# EAGLE board LumiBeePCB_v1A_2130spi_1 (EAGLE 9.4.1)
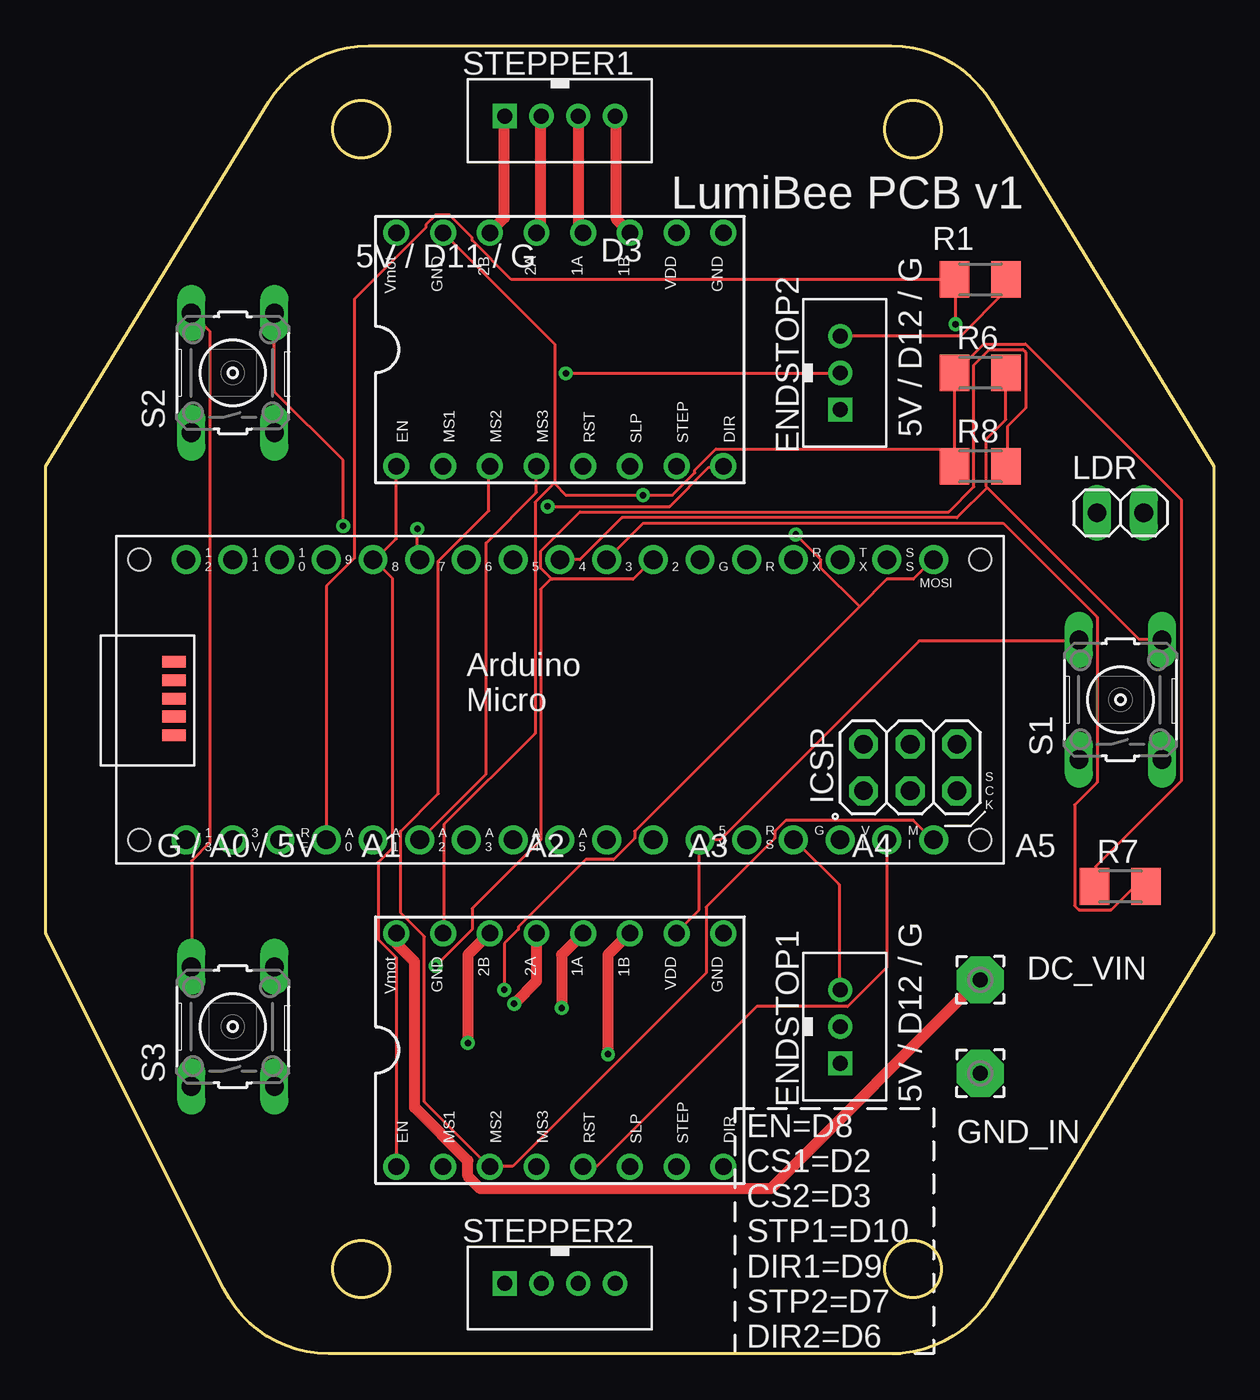
[diagram p0: board, top side]
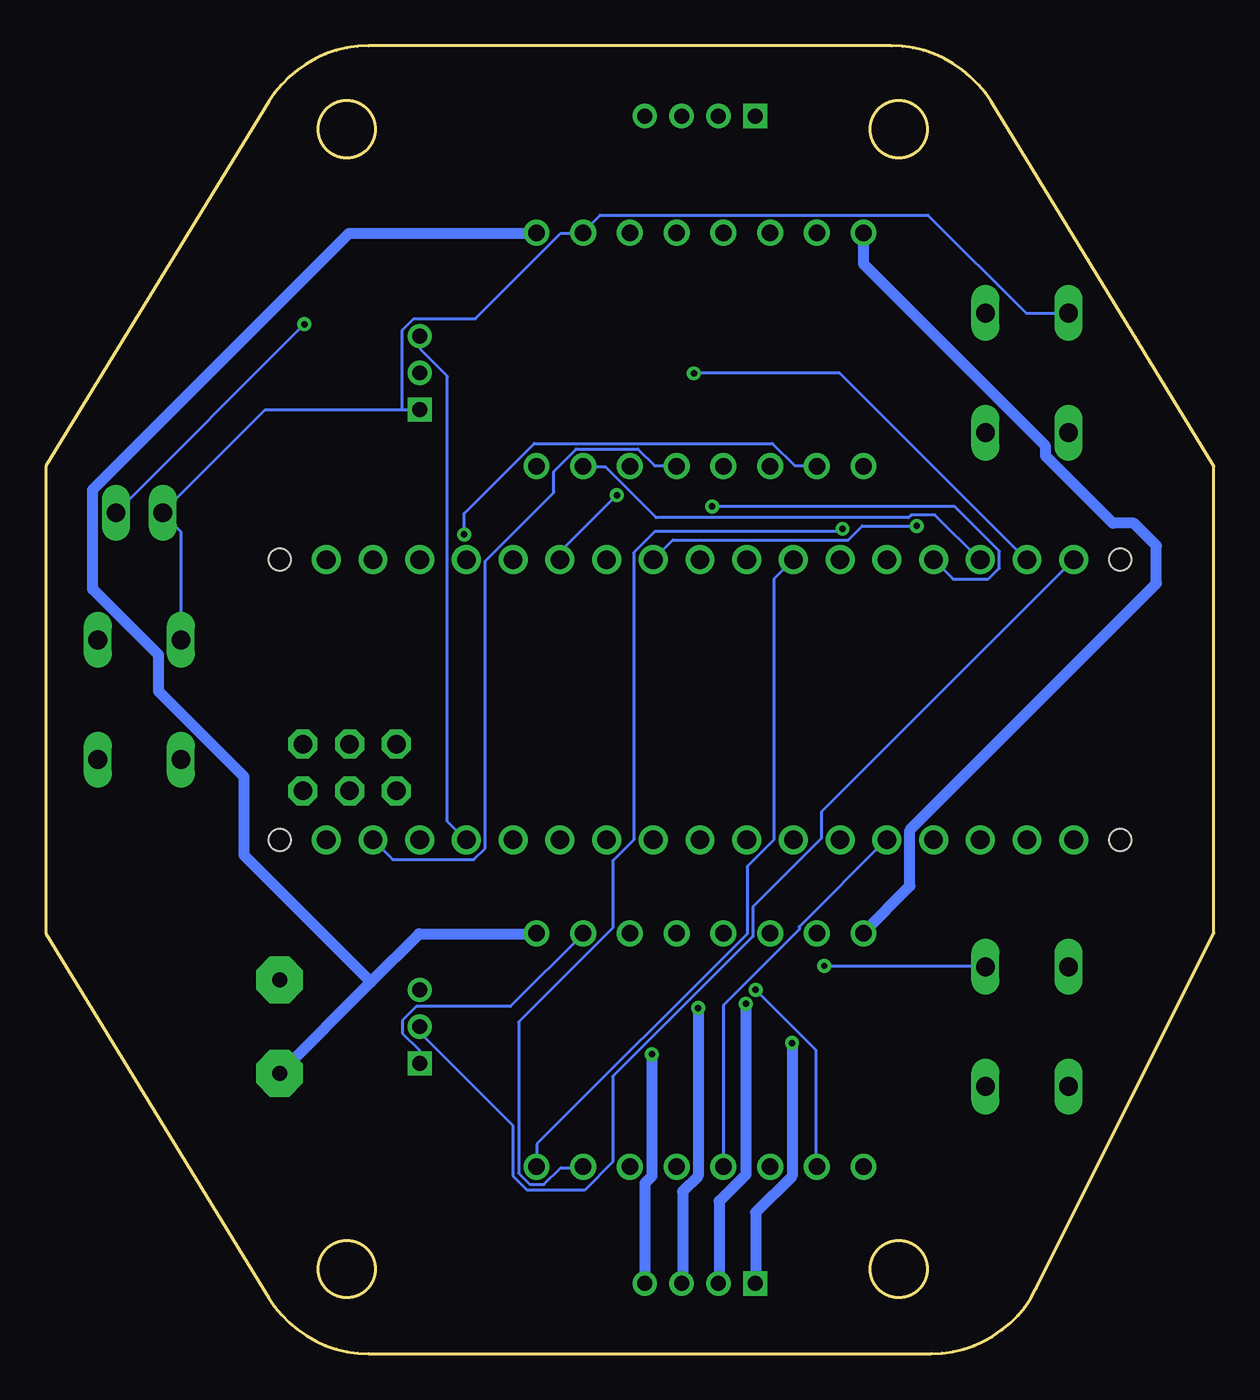
[diagram p1: board, bottom side, seen from below]

Size 63.5 x 71.12 mm. Coordinates in mm from the lower left corner, seen from the top.
Outline: 0,22.86 0,48.26 12.11,68.08 arc-59 17.53,71.12 45.97,71.12 arc-59 51.39,68.08 63.5,48.26 63.5,22.86 51.39,3.04 arc-59 45.97,0 15.36,0 arc-63 9.67,3.51 0,22.86
Outline: circle at 47.14,66.6 radius 1.55
Outline: circle at 17.14,66.6 radius 1.55
Outline: circle at 47.14,4.6 radius 1.55
Outline: circle at 17.14,4.6 radius 1.55
Copper layers (1*16): Top 0.035mm / dielectric 1.5mm / Bottom 0.035mm
Design rules "default": minimum track width 6mil, minimum drill 0.35mm, track to track 6mil, track to pad 6mil, pad to pad 6mil, via to via 6mil, smd to smd 6mil, copper to edge 40mil, drill to drill 6mil, minimum pad ring 10mil, minimum via ring 8mil, stop-mask expansion 4mil, vias tented up to drill 0mil, thermal gap 10mil
Net classes: 1 power: width 0.61 mm

## Footprints (pad centres in the part's own frame; a part is rotated, then mirrored left to right if it is on the bottom)
2,54/0,8 = drill 0.813 pad 2.54 octagon: 1 0,0
B3B-PH-K-S = drill 0.813 square: 1 2,0 | drill 0.813: 2 0,0; 3 -2,0
1X02 = drill 1.016 long: 1 -1.27,0; 2 1.27,0
ARDUINO_MICRO = drill 1.016 pad 1.575: 3V3 6.35,1.27; +5V 31.75,1.27; A0 11.43,1.27; A1 13.97,1.27; A2 16.51,1.27; A3 19.05,1.27; A4 21.59,1.27; A5 24.13,1.27; D2 29.21,16.51; D3 26.67,16.51; D4 24.13,16.51; D5 21.59,16.51; D6 19.05,16.51; D7 16.51,16.51; D8 13.97,16.51; D9 11.43,16.51; D10 8.89,16.51; D11 6.35,16.51; D12 3.81,16.51; D13 3.81,1.27; GND 31.75,16.51; GND. 36.83,1.27; MISO] 41.91,1.27; MOSI 44.45,16.51; NC 26.67,1.27; NC. 29.21,1.27; REF 8.89,1.27; RST 34.29,16.51; RST. 34.29,1.27; RX1 36.83,16.51; SCK 44.45,1.27; SS 41.91,16.51; TX1 39.37,16.51; VIN 39.37,1.27 | drill 1.016 pad 1.575 octagon: 5V 40.64,6.477; GND_ 45.72,6.477; MISO. 40.64,3.937; MOSI. 43.18,6.477; RESET.. 45.72,3.937; SCK. 43.18,3.937 | smd 1.27 x 0.635: <USB>+V 3.15,10.947; <USB>D+ 3.15,9.957; <USB>D- 3.15,8.941; <USB>GND 3.15,6.96; <USB>ID 3.15,7.976 | hole 1.2: 1.27,1.27; 1.27,16.51; 46.99,16.51; 46.99,1.27
M1206 = smd 1.6 x 2: 1 -1.4,0; 2 1.4,0
B3F-10XX = drill 1.016 long: 1 -3.251,2.261; 2 3.251,2.261; 3 -3.251,-2.261; 4 3.251,-2.261
B4B-PH-K-S = drill 0.813 square: 1 3,0 | drill 0.813: 2 1,0; 3 -1,0; 4 -3,0
A4988BREAKOUT = drill 0.9: 1A 8.89,1.27; 1B 11.43,1.27; 2A 6.35,1.27; 2B 3.81,1.27; DIR 16.51,-11.43; EN -1.27,-11.43; GND 16.51,1.27; GND@0 1.27,1.27; MS1 1.27,-11.43; MS2 3.81,-11.43; MS3 6.35,-11.43; RST 8.89,-11.43; SLP 11.43,-11.43; STEP 13.97,-11.43; VDD 13.97,1.27; VMOT -1.27,1.27

## Placement (x,y rotation side)
DC_VIN  [2,54/0,8]  50.8,20.32 0 top
ENDSTOP1  3PIN  [B3B-PH-K-S]  43.18,17.78 270 top
ENDSTOP2  3PIN  [B3B-PH-K-S]  43.18,53.34 270 top
GND_IN  [2,54/0,8]  50.8,15.24 0 top
LDR  [1X02]  58.42,45.72 0 top
PCB1  ARDUINO_MICRO  [ARDUINO_MICRO]  3.81,26.67 0 top
R1  [M1206]  50.8,58.42 180 top
R6  [M1206]  50.8,53.34 0 top
R7  [M1206]  58.42,25.4 0 top
R8  [M1206]  50.8,48.26 0 top
S1  [B3F-10XX]  58.42,35.56 90 top
S2  [B3F-10XX]  10.16,53.34 90 top
S3  [B3F-10XX]  10.16,17.78 90 top
STEPPER1  4PIN  [B4B-PH-K-S]  27.94,67.31 180 top
STEPPER2  4PIN  [B4B-PH-K-S]  27.94,3.81 180 top
U$1  A4988BREAKOUT  [A4988BREAKOUT]  20.32,59.69 0 top
U$2  A4988BREAKOUT  [A4988BREAKOUT]  20.32,21.59 0 top

## Library data of the parts
DC_VIN GND_IN = wirepad
ENDSTOP1 ENDSTOP2 STEPPER1 STEPPER2 = jst_eph
LDR = pinhead
PCB1 = E14_Arduino_revC
R1 R6-R8 = rcl; SPICEPREFIX: R
S1-S3 = switch-omron; MPN: B3F-1000; OC_FARNELL: 176432; OC_NEWARK: 36M3542
U$1 U$2 = RepRapjr

## Nets
CS1: PCB1.A1 U$2.MS3
CS2: PCB1.A2 U$1.MS3
GND: ENDSTOP1.3 ENDSTOP2.3 PCB1.GND. R1.1
MISO: PCB1.MISO] U$1.RST U$2.RST
MOSI: PCB1.MOSI U$1.MS1 U$2.MS1
N$8 [power]: GND_IN.1 U$1.GND U$2.GND
N$9 [power]: DC_VIN.1 U$1.VMOT U$2.VMOT
N$10 [power]: STEPPER1.1 U$1.2B
N$11: PCB1.GND R6.1 R7.1 R8.1 U$1.GND@0 U$2.GND@0
N$12: ENDSTOP1.2 PCB1.D12
N$13 [power]: STEPPER1.2 U$1.2A
N$14 [power]: STEPPER1.3 U$1.1A
N$15 [power]: STEPPER1.4 U$1.1B
N$16 [power]: STEPPER2.1 U$2.2B
N$17 [power]: STEPPER2.2 U$2.2A
N$18 [power]: STEPPER2.3 U$2.1A
N$19 [power]: STEPPER2.4 U$2.1B
N$20: ENDSTOP2.2 PCB1.D11
N$21: PCB1.D10 U$1.STEP
N$22: PCB1.D9 U$1.DIR
N$23: PCB1.D8 U$1.EN U$2.EN
N$24: PCB1.D7 U$2.STEP
N$25: PCB1.D6 U$2.DIR
N$29: LDR.2 PCB1.A0 R1.2
N$31: PCB1.D2 R8.2 S3.4
N$41: PCB1.D3 R7.2 S2.4
N$42: PCB1.D4 R6.2 S1.4
SCK: PCB1.SCK U$1.MS2 U$2.MS2
VCC: ENDSTOP1.1 ENDSTOP2.1 LDR.1 PCB1.+5V S1.2 S2.2 S3.2 U$1.VDD U$2.VDD

## Tracks (layer width: path | path; a pad name or v marks a point on that pad's centre or on a via)
CS1
  Bottom 0.152: U$2.MS3 26.67,18.95 22.55,23.06 22.55,23.22 17.83,27.94 PCB1.A1
CS2
  Top 0.152: U$1.MS3 26.67,46.84 23.93,44.09 23.93,31.52 20.34,27.94 PCB1.A2
GND
  Top 0.152: R1.1 52.2,57.81 49.76,55.37 43.2,55.37 ENDSTOP2.3 | ENDSTOP1.3 43.13,19.79 43.13,25.5 40.69,27.94 PCB1.GND.
  Bottom 0.152: ENDSTOP2.3 43.13,55.3 43.13,54.61 41.68,53.16 41.68,28.93 40.69,27.94 PCB1.GND.
MISO
  Top 0.152: PCB1.MISO] 45.72,21.01 43.59,18.87 38.63,18.87 29.95,10.19 29.26,10.19 U$2.RST
  Bottom 0.152: PCB1.MISO] 44.65,26.87 40.23,26.87 39.62,27.48 39.62,43.1 35.89,46.84 35.89,47.98 34.67,49.2 31.32,49.2 30.4,48.29 29.26,48.29 U$1.RST
MOSI  (via drill 0.35)
  Top 0.152: v24.92,19.79 24.92,22.3 25.68,23.06 25.68,23.22 29.34,26.87 30.86,26.87 32,28.02 32,28.4 44.23,40.63 | 44.23,40.63 45.72,42.11 47.17,42.11 48.23,43.18 PCB1.MOSI | v40.77,44.55 42.14,43.18 42.14,42.72 44.23,40.63
  Bottom 0.152: v24.92,19.79 21.64,16.51 21.64,10.19 U$2.MS1 | v40.77,44.55 40.77,45.7 36.96,49.51 24,49.51 22.78,48.29 21.64,48.29 U$1.MS1
N$8
  Bottom 0.61: GND_IN.1 45.83,20.21 | 45.83,20.21 43.2,22.84 36.88,22.84 U$2.GND | 45.83,20.21 52.73,27.1 52.73,31.37 57.38,36.02 57.38,38 60.96,41.58 60.96,46.99 47.02,60.93 36.88,60.93 U$1.GND
N$9
  Top 0.61: U$2.VMOT 19.05,22.3 20.04,21.31 20.04,13.39 22.94,10.49 22.94,9.65 23.62,8.97 39.4,8.97 50.75,20.32 DC_VIN.1
  Bottom 0.61: U$1.VMOT 19.05,59.26 9.14,49.35 9.14,48.82 5.49,45.16 4.34,45.16 3.12,43.94 3.12,41.88 16.54,28.47 16.54,25.43 19.05,22.91 U$2.VMOT
N$10
  Top 0.61: STEPPER1.1 24.92,67.26 24.92,61.77 24.16,61.01 U$1.2B
N$11  (via drill 0.35)
  Top 0.152: 49.38,49.2 49.38,53.32 R6.1 49.45,53.39 50.98,54.91 53.26,54.91 61.72,46.46 61.72,31.14 57.07,26.49 57.07,25.43 R7.1 | 49.38,49.2 49.38,48.29 R8.1 49.38,49.2 | 27.62,47.33 27.66,47.37 27.66,54.91 21.64,60.93 U$1.GND@0 | 27.62,47.33 26.59,46.3 26.59,33.73 21.64,28.78 21.64,22.91 U$2.GND@0 | 27.62,47.33 28.27,46.68 v32.46,46.68 34.06,46.68 35.28,47.9 35.28,48.06 36.42,49.2 49.38,49.2
  Bottom 0.152: v32.46,46.68 35.51,43.64 35.51,43.18 PCB1.GND
N$12
  Bottom 0.152: PCB1.D12 21.34,29.46 21.34,28.02 25.07,24.28 25.07,22.68 32.69,15.06 32.69,10.41 34.21,8.89 37.34,8.89 38.1,9.65 38.1,12.4 43.13,17.42 43.13,17.73 ENDSTOP1.2
N$13
  Top 0.61: STEPPER1.2 26.9,67.26 26.9,61.24 26.67,61.01 U$1.2A
N$14
  Top 0.61: STEPPER1.3 28.96,67.26 28.96,61.24 29.19,61.01 U$1.1A
N$15
  Top 0.61: U$1.1B 31.01,61.7 31.01,67.26 STEPPER1.4
N$16  (via drill 0.35)
  Top 0.61: v22.94,16.89 22.94,21.69 24.08,22.84 U$2.2B
  Bottom 0.61: v22.94,16.89 22.94,9.65 24.92,7.67 24.92,3.86 STEPPER2.1
N$17  (via drill 0.35)
  Top 0.61: v25.45,19.02 26.67,20.24 U$2.2A
  Bottom 0.61: v25.45,19.02 25.45,9.73 26.9,8.28 26.9,3.86 STEPPER2.2
N$18  (via drill 0.35)
  Top 0.61: v28.04,18.8 28.04,21.69 U$2.1A
  Bottom 0.61: v28.04,18.8 28.04,9.65 28.88,8.81 28.88,3.86 STEPPER2.3
N$19  (via drill 0.35)
  Top 0.61: v30.56,16.28 30.56,21.69 31.7,22.84 U$2.1B
  Bottom 0.61: v30.56,16.28 30.56,9.65 30.94,9.27 30.94,3.86 STEPPER2.4
N$20  (via drill 0.35)
  Top 0.152: v28.27,53.32 43.13,53.32 ENDSTOP2.2
  Bottom 0.152: v28.27,53.32 20.34,53.32 10.21,43.18 PCB1.D11
N$21
  Bottom 0.152: U$1.STEP 34.29,48.21 33.07,48.21 30.33,45.47 16.61,45.47 16.46,45.62 15.16,45.62 12.73,43.18 PCB1.D10
N$22  (via drill 0.35)
  Top 0.152: v27.28,46.08 33.91,46.08 36.04,48.21 36.8,48.21 U$1.DIR
  Bottom 0.152: v27.28,46.08 14.1,46.08 11.66,43.64 11.66,42.72 12.27,42.11 14.17,42.11 PCB1.D9
N$23
  Top 0.152: U$2.EN 19.05,21.54 18.06,22.53 18.06,26.72 18.82,27.48 18.82,42.19 17.83,43.18 PCB1.D8 17.91,43.18 19.05,44.32 U$1.EN
N$24  (via drill 0.35)
  Top 0.152: v20.19,44.86 20.19,43.26 20.27,43.18 PCB1.D7
  Bottom 0.152: v20.19,44.86 20.34,44.7 30.4,44.7 31.55,43.56 31.55,27.94 32.69,26.8 32.69,23.14 37.8,18.03 37.8,9.8 37.19,9.2 36.42,9.2 35.51,10.11 34.29,10.11 U$2.STEP
N$25
  Bottom 0.152: PCB1.D6 23.93,42.11 23.93,27.94 25.38,26.49 25.38,22.84 36.8,11.41 36.8,10.19 U$2.DIR
N$29  (via drill 0.35)
  Top 0.152: v49.45,55.98 49.45,58.42 R1.2 25.3,58.42 23.16,60.55 23.16,60.71 21.95,61.93 21.18,61.93 20.65,61.39 20.65,61.24 16.76,57.35 16.76,43.26 15.24,41.73 PCB1.A0
  Bottom 0.152: v49.45,55.98 59.67,45.77 LDR.2
N$31  (via drill 0.35)
  Top 0.152: 27.47,42.15 27.51,42.11 31.93,42.11 32.99,43.18 PCB1.D2 | 27.47,42.15 26.9,42.72 26.9,43.64 29.03,45.77 49.07,45.77 50.44,47.14 50.44,53.77 51.28,54.61 53.11,54.61 53.26,54.46 53.26,51.41 52.27,50.42 52.27,48.29 R8.2 | v21.18,21.08 23.16,23.06 23.16,24.21 26.9,27.94 26.9,41.58 27.47,42.15
  Bottom 0.152: v21.18,21.08 12.42,21.08 S3.4
N$41  (via drill 0.35)
  Top 0.152: PCB1.D3 32.46,45.16 52.05,45.16 57.15,40.06 57.15,31.06 55.93,29.84 55.93,24.36 56.16,24.13 57.91,24.13 59.13,25.35 59.82,25.35 R7.2 | S2.4 12.42,52.32 16.15,48.59 v16.15,45.01
  Bottom 0.152: v16.15,45.01 19.13,45.01 19.89,44.25 29.41,44.25 PCB1.D3
N$42
  Top 0.152: 51.17,47.1 59.44,38.84 60.66,38.84 S1.4 | 51.17,47.1 51.13,47.14 51.13,49.73 52.2,50.8 52.2,53.32 R6.2 | PCB1.D4 29.03,43.18 31.32,45.47 49.53,45.47 51.17,47.1
SCK
  Top 0.152: PCB1.SCK 48.23,27.94 47.17,29.01 40.23,29.01 39.62,28.4 39.62,28.02 35.89,24.28 35.89,20.7 25.38,10.19 24.16,10.19 U$2.MS2 24.08,10.19 20.57,13.69 20.57,22.68 19.28,23.98 19.28,28.4 21.34,30.45 21.34,43.1 24.08,45.85 24.08,48.21 U$1.MS2
VCC
  Top 0.152: S3.2 7.93,21.08 7.93,26.8 8.91,27.79 8.91,55.6 7.93,56.59 S2.2 | U$2.VDD 34.29,22.91 35.51,24.13 35.51,27.94 PCB1.+5V 36.65,27.94 47.47,38.76 56.16,38.76 S1.2
  Bottom 0.152: ENDSTOP1.1 43.2,15.82 43.2,16.51 44.12,17.42 44.12,18.11 43.36,18.87 38.25,18.87 34.29,22.84 U$2.VDD | 44.12,51.33 51.59,51.33 57.15,45.77 LDR.1 57.15,45.7 56.16,44.7 S1.2 | 44.12,51.33 43.2,51.33 ENDSTOP2.1 | 44.12,51.33 44.12,55.68 43.51,56.29 40.16,56.29 35.51,60.93 34.29,60.93 U$1.VDD 34.29,61.01 33.38,61.93 15.55,61.93 10.21,56.59 S2.2

## Text on the board
tPlace: LumiBee PCB v1 | D3 | 5V / D11 / G | 5V / D12 / G | G / A0 / 5V | A1 | A2 | A3 | A4 | A5 | 5V / D12 / G | EN=D8 / CS1=D2 / CS2=D3 / STP1=D10 / DIR1=D9 / STP2=D7 / DIR2=D6